# Altium PCB P-MOS DMP3013SFV-7_PCB.PcbDoc
Units mil, origin at the board's own origin, x right, y up, seen from the top; angles counter-clockwise.
Board outline not stored, 2 copper layers (Top Layer, Bottom Layer); 8 components, 0 nets, 27 pads, 0 vias.
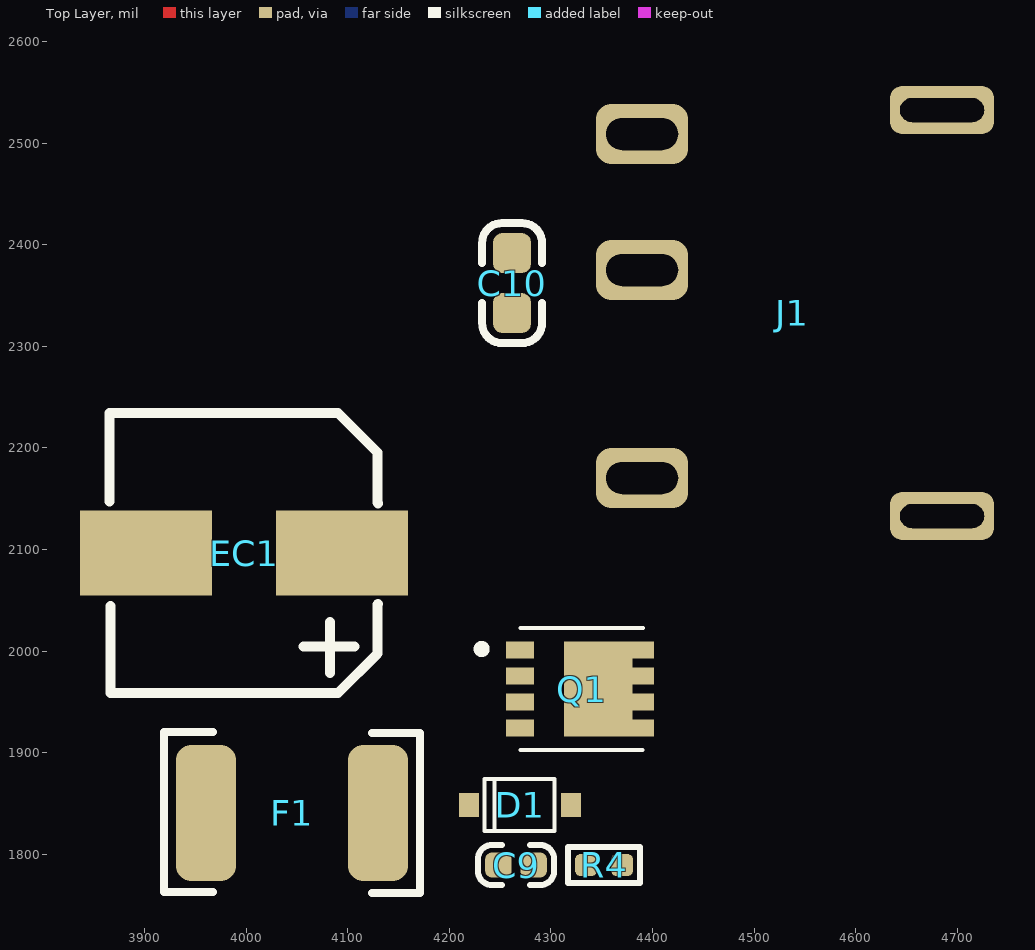
[diagram p0: Top Layer view]
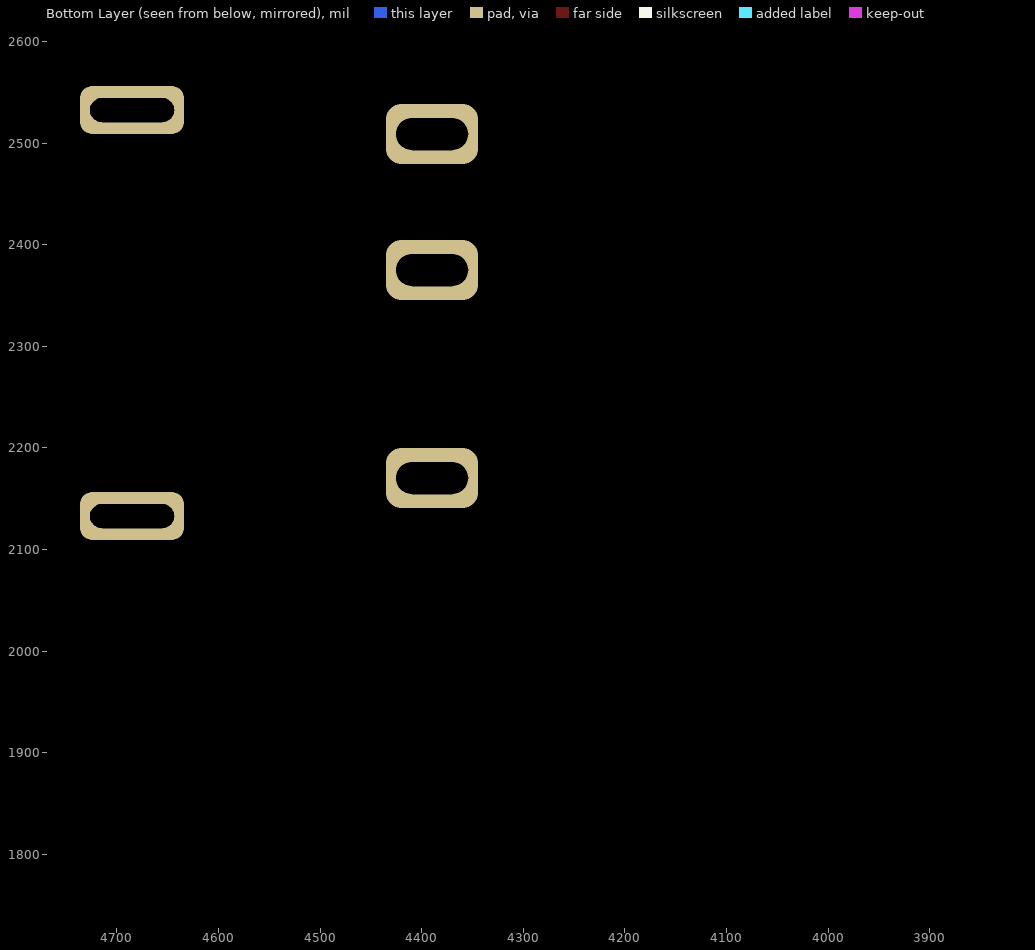
[diagram p1: Bottom Layer view, seen from below]

## Layer stack, top to bottom
Top Solder: solder mask 0.4, Solder Resist, Dk 3.5
Top Layer: signal copper 1.4
Dielectric 1: dielectric 12.6, FR-4, Dk 4.8
Bottom Layer: signal copper 1.4
Bottom Solder: solder mask 0.4, Solder Resist, Dk 3.5

## Components (designator, comment, footprint, x,y, rotation, side; value= is the part's Value field where it differs from the comment)
C9 "100nF" C_0402 4265.75,1789.37 r0 top
C10 "100nF/100V" C_0603 4261.81,2362.2 r90 top
D1 "BZT52C12S" SOD-323 4269.69,1848.43 r180 top
EC1 "68uF 25V" SMD-EC6.3X6.3X10 3998.03,2096.46 r180 top
F1 "2.5A 14V" Fuse_1812 4045.28,1840.55 r180 top
J1 "DC-044B-2.0" DC-044B 4537.4,2332.68 r90 top
Q1 "DMP3013SFV-7" DMP3013SFV7 4269.69,1962.6 r270 top
R4 "12kΩ" R_0402 4352.36,1789.37 r180 top

## Footprints (in the part's own frame and the unit in brackets; to place one, negate y for a bottom-side part, rotate by r counter-clockwise, add the part's x,y. Pads: shape width x height; smd on the part's side, far side on the other; paste and mask are expansions set on the pad)
C_0402 [mm] "Chip Capacitor, 2-Leads, Body 1.00x0.50mm, IPC Medium Density"
  rrect50% 0.66x0.62 smd: 1(-0.44,0) 2(0.44,0)
  silkscreen extent -0.95,-0.5 0.95,0.5, body extent -0.52,-0.27 0.53,0.28, height 0.55
C_0603 [mm] "Chip Capacitor, 2-Leads, Body 1.60x0.80mm, IPC Medium Density"
  rrect50% 1x0.95 smd: 1(-0.75,0) 2(0.75,0)
  silkscreen extent -1.5,-0.75 1.5,0.75, body extent -0.8,-0.4 0.8,0.4, height 0.87
DC-044B [mm]
  oval 0.2x0.7 hole 2.1 unplated: 0(1.075,-2.65)
  rrect50% 1.5x2.3 hole 0.8 slot 1.8 at 90 deg: 2(-4.125,3.75) 3(1.075,3.75) 4(4.475,3.75)
  rrect50% 1.2x2.6 hole 0.6 slot 2.1 at 90 deg: 5(-5.075,-3.75) 5(5.075,-3.75)
  body extent -5.17,-6.81 5.13,5.04, height 7.3
DMP3013SFV7 [mm]
  rect 0.42x0.7 smd: 1(-0.975,0) 2(-0.325,0) 3(0.325,0) 4(0.975,0)
  rect 0.42x0.54 smd: 5(0.975,3.08) 6(0.325,3.08) 7(-0.325,3.08) 8(-0.975,3.08)
  rect 2.37x1.71 smd: 9(0,1.955)
  silkscreen extent -1.53,-1.06 1.53,3.08, body extent -1.53,-0.31 1.53,3.31, height 0.95
Fuse_1812 [mm]
  rrect50% 1.5x3.4 smd: 1(-2.15,0) 2(2.15,0)
  silkscreen extent -3.2,-2.02 3.2,2, body extent -2.28,-1.62 2.27,1.62, height 0.9
R_0402 [mm] "Chip Resistor, 2-Leads, Body 1.00x0.50mm, IPC Medium Density"
  rrect50% 0.55x0.55 smd: 1(-0.45,0) 2(0.45,0)
  silkscreen extent -0.9,-0.45 0.9,0.45, body extent -0.5,-0.27 0.5,0.28, height 0.4
SMD-EC6.3X6.3X10 [mm]
  rect 3.3x2.132 smd: 1(-2.45,0) 2(2.45,0)
  silkscreen extent -3.35,-3.5 3.36,3.5, body extent -3.56,-3.3 3.44,3.3, height 5.4
SOD-323 [mm] "塑封二极管"
  rect 0.5x0.6 smd: A(-1.27,0) K(1.27,0)
  silkscreen extent -0.86,-0.65 0.89,0.65, body extent -1.25,-0.64 1.25,0.62, height 0.9

## Part data
C9 C10: library part Cap_Chip, "贴片电容"
D1: library part Diode_Zener, "稳压二极管", LCSC=C2891797, Manufacturer_Name=YONGYUTAI(永裕泰), Manufacturer_Part_Number=BZT52C12S
EC1: library part Cap_E_SMD, "贴片电解电容", LCSC=C249947, Manufacturer_Name=lelon(台湾立隆), Manufacturer_Part_Number=VZH680M1ETR-0606
F1: library part FUSE_PTC, "自恢复贴片保险丝", LCSC=C381482, Manufacturer_Name=TLC(竞沃), Manufacturer_Part_Number=TLC-MSMD250/14
J1: library part DC-044B, "DC电源座子", Manufacturer_Name="XKB Connectivity(中国星坤)", Manufacturer_Part_Number=DC-044B-3A-2.0
Q1: "MOSFET (P-Channel)", LCSC=C264098,C461071, Manufacturer_Name="Diodes Inc.", Manufacturer_Name_1=ALLPOWER(铨力), Manufacturer_Part_Number_1=AP15P03Q, Manufacturer_Part_Number=DMP3013SFV-7
R4: library part Res_Chip, "贴片电阻"

## Nets (pads, with @x,y where several pads share a name; then routed paths per layer and width w, separated by ;. In a path a pad name is that pad's centre, name@x,y a point inside that pad or via, vN(x,y) a via of type N, cw(c..) or ccw(c..) an arc to the next point about the centre after c; other vN are vias at no path point)
pads on no net: C9.1 C9.2 C10.1 C10.2 D1.A D1.K EC1.1 EC1.2 F1.1 F1.2 J1.0 J1.2 J1.3 J1.4 J1.5 Q1.1 Q1.2 Q1.3 Q1.4 Q1.5 Q1.6 Q1.7 Q1.8 Q1.9 R4.1 R4.2